# EAGLE board AiOT_Firefighter_MPV (EAGLE 9.7.0)

Size 87.13 x 113.01 mm. Coordinates in mm from the lower left corner, seen from the top.
Outline: 0,0 87.13,0 87.13,113.01 0,113.01 0,0
Copper layers (1*16): Top 0.035mm / dielectric 1.5mm / Bottom 0.035mm
Design rules "default": minimum track width 6mil, minimum drill 0.35mm, track to track 6mil, track to pad 6mil, pad to pad 6mil, via to via 6mil, smd to smd 6mil, copper to edge 40mil, drill to drill 6mil, minimum pad ring 10mil, minimum via ring 8mil, stop-mask expansion 4mil, vias tented up to drill 0mil, thermal gap 10mil

## Footprints (pad centres in the part's own frame; a part is rotated, then mirrored left to right if it is on the bottom)
LEDRD254W60D565H860B_B = drill 0.981 pad 1.581: 1 -1.27,0; 2 1.27,0
LEDRD254W60D565H860B = drill 0.981 pad 1.581: 1 -1.27,0; 2 1.27,0
PIEZO = drill 1 pad 1.6: 1 -3.5,0; 2 3.5,0
RESAD1016W63L850D250B = drill 0.83 pad 1.43: 1 -5.08,0; 2 5.08,0
ARDUINO-UNO-R3-SHIELD = drill 1.016 pad 1.88: 3.3V 24.13,-2.54; 5V 24.13,0; A0 24.13,12.7; A1 24.13,15.24; A2 24.13,17.78; A3 24.13,20.32; A4 24.13,22.86; A5 24.13,25.4; AREF -24.13,-13.97; D2 -24.13,20.32; D3 -24.13,17.78; D4 -24.13,15.24; D5 -24.13,12.7; D6 -24.13,10.16; D7 -24.13,7.62; D8 -24.13,3.81; D9 -24.13,1.27; D10 -24.13,-1.27; D11 -24.13,-3.81; D12 -24.13,-6.35; D13 -24.13,-8.89; GND@0 24.13,2.54; GND@1 24.13,5.08; GND@2 -24.13,-11.43; IOREF 24.13,-7.62; NC 24.13,-10.16; RES 24.13,-5.08; RX -24.13,25.4; SCL -24.13,-19.05; SDA -24.13,-16.51; TX -24.13,22.86; VIN 24.13,7.62
TO92 = drill 0.813 octagon: 1 -1.27,0; 2 0,1.905; 3 1.27,0
LCD-I2C = drill 1.016 long: 1 -19.05,-5.08; 2 -19.05,-7.62; 3 -19.05,-10.16; 4 -19.05,-12.7

## Placement (x,y rotation side)
DSAFE  BLUE  [LEDRD254W60D565H860B_B]  79.22,61.01 90 top
DWARNING  RED  [LEDRD254W60D565H860B]  79.22,78.01 90 top
PIEZO1  PIEZO  [PIEZO]  17.23,99.43 0 top
R1  330k  [RESAD1016W63L850D250B]  60.84,100.72 90 top
R2  330k  [RESAD1016W63L850D250B]  58.3,100.72 90 top
U1  ARDUINO-UNO-R3-SHIELD  [ARDUINO-UNO-R3-SHIELD]  47.88,71.51 270 top
U2  TMP36GT9Z_TO92  [TO92]  78.15,70.07 270 top
U3  LCD-16X2-I2CSUNFOUNDER-IIC  [LCD-I2C]  30.88,36.63 0 top

## Library data of the parts
DSAFE = Tinkercad; CATEGORY: Opto-Electronic; SUB-CATEGORY: LED; VALUE: LED_BLUE
DWARNING = Tinkercad; CATEGORY: Opto-Electronic; SUB-CATEGORY: LED; VALUE: LED_RED
PIEZO1 R1 R2 U1-U3 = Tinkercad

## Nets
DSAFE_A: DSAFE.1 R1.2
DWARNING_A: DWARNING.1 R2.2
U1_5V: U1.5V U2.3 U3.2
U1_A0: U1.A0 U2.2
U1_A4: U1.A4 U3.3
U1_A5: U1.A5 U3.4
U1_D5: R1.1 U1.D5
U1_D6: R2.1 U1.D6
U1_D7: PIEZO1.1 U1.D7
U1_GND: DSAFE.2 DWARNING.2 PIEZO1.2 U1.GND@0 U1.GND@1 U1.GND@2 U2.1 U3.1

## Tracks (layer width: path | path; a pad name or v marks a point on that pad's centre or on a via)
DSAFE_A  (1 unrouted)
DWARNING_A  (1 unrouted)
U1_5V  (2 unrouted)
U1_A0  (1 unrouted)
U1_A4  (1 unrouted)
U1_A5  (1 unrouted)
U1_D5  (1 unrouted)
U1_D6  (1 unrouted)
U1_D7  (1 unrouted)
U1_GND  (7 unrouted)